# Altium PCB PCB1.PcbDoc
Units mm, origin at the board's own origin, x right, y up, seen from the top; angles counter-clockwise.
Board outline 34.54 x 36.2 mm, 4 copper layers (L1 (Signal), L2 (GND), L3 (3.3V), L4 (Signal)), stack 1.57 mm thick; 24 components, 32 nets, 114 pads, 38 vias.
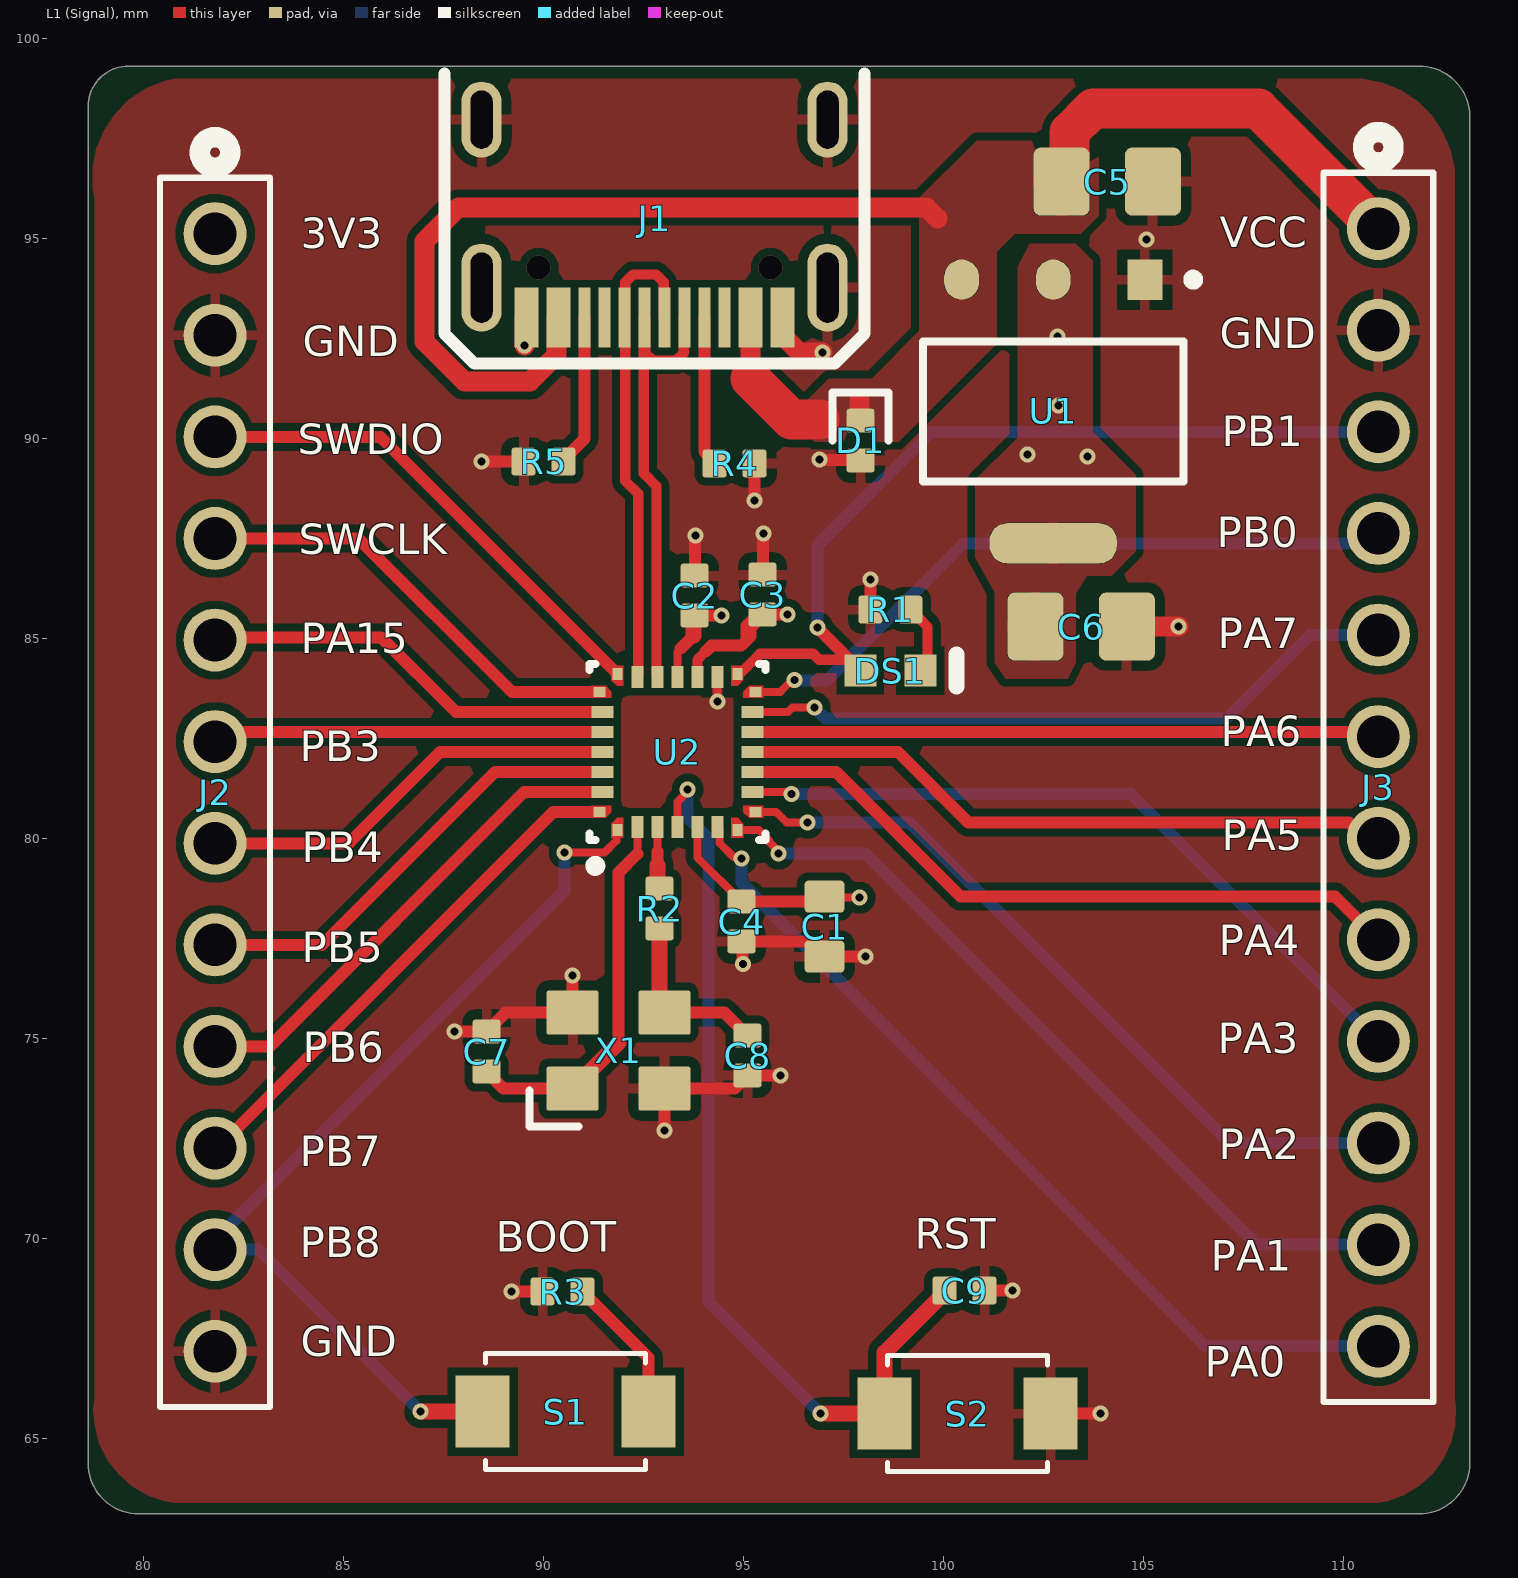
[diagram p0: L1 (Signal) view]
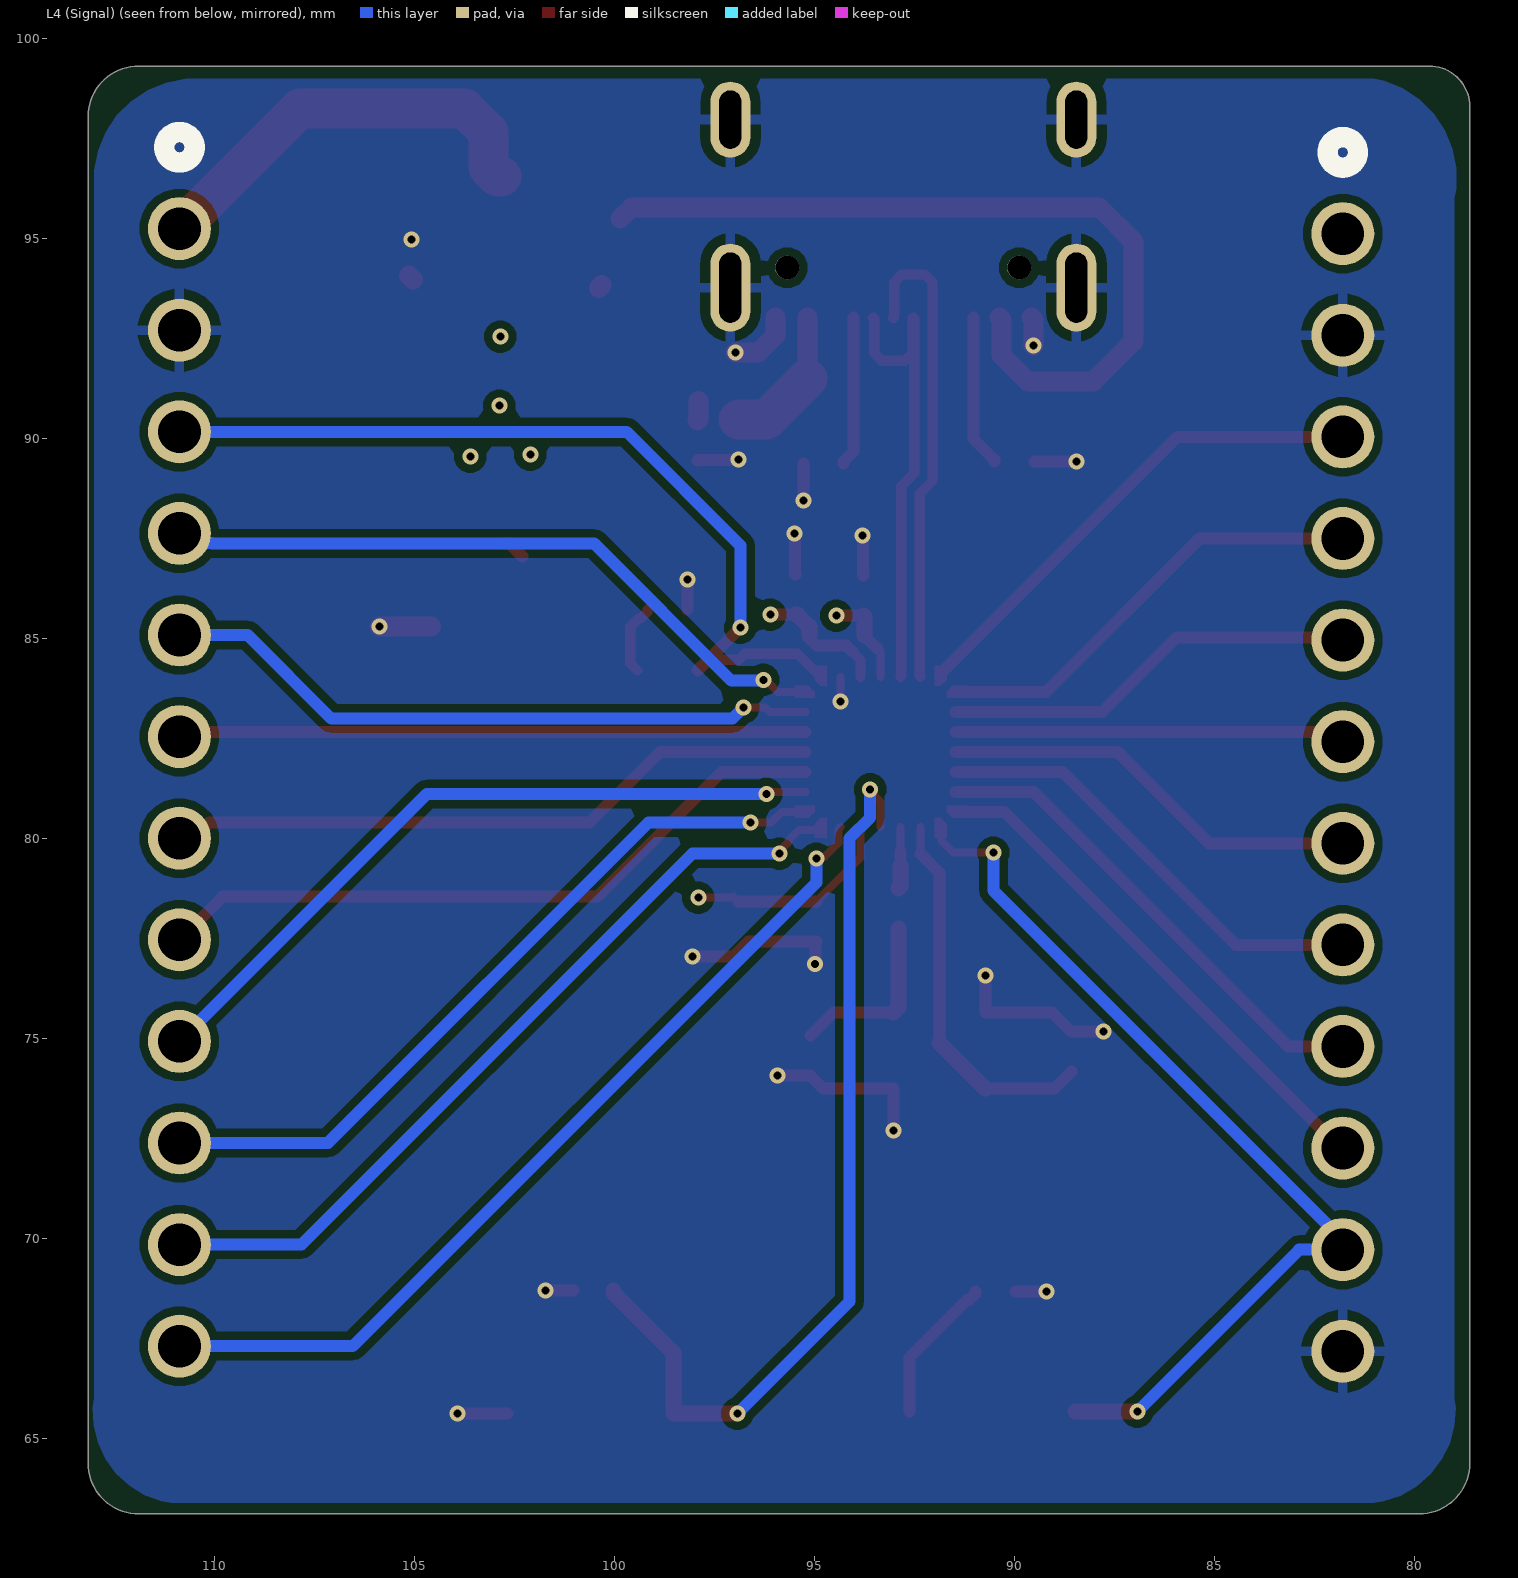
[diagram p1: L4 (Signal) view, seen from below]
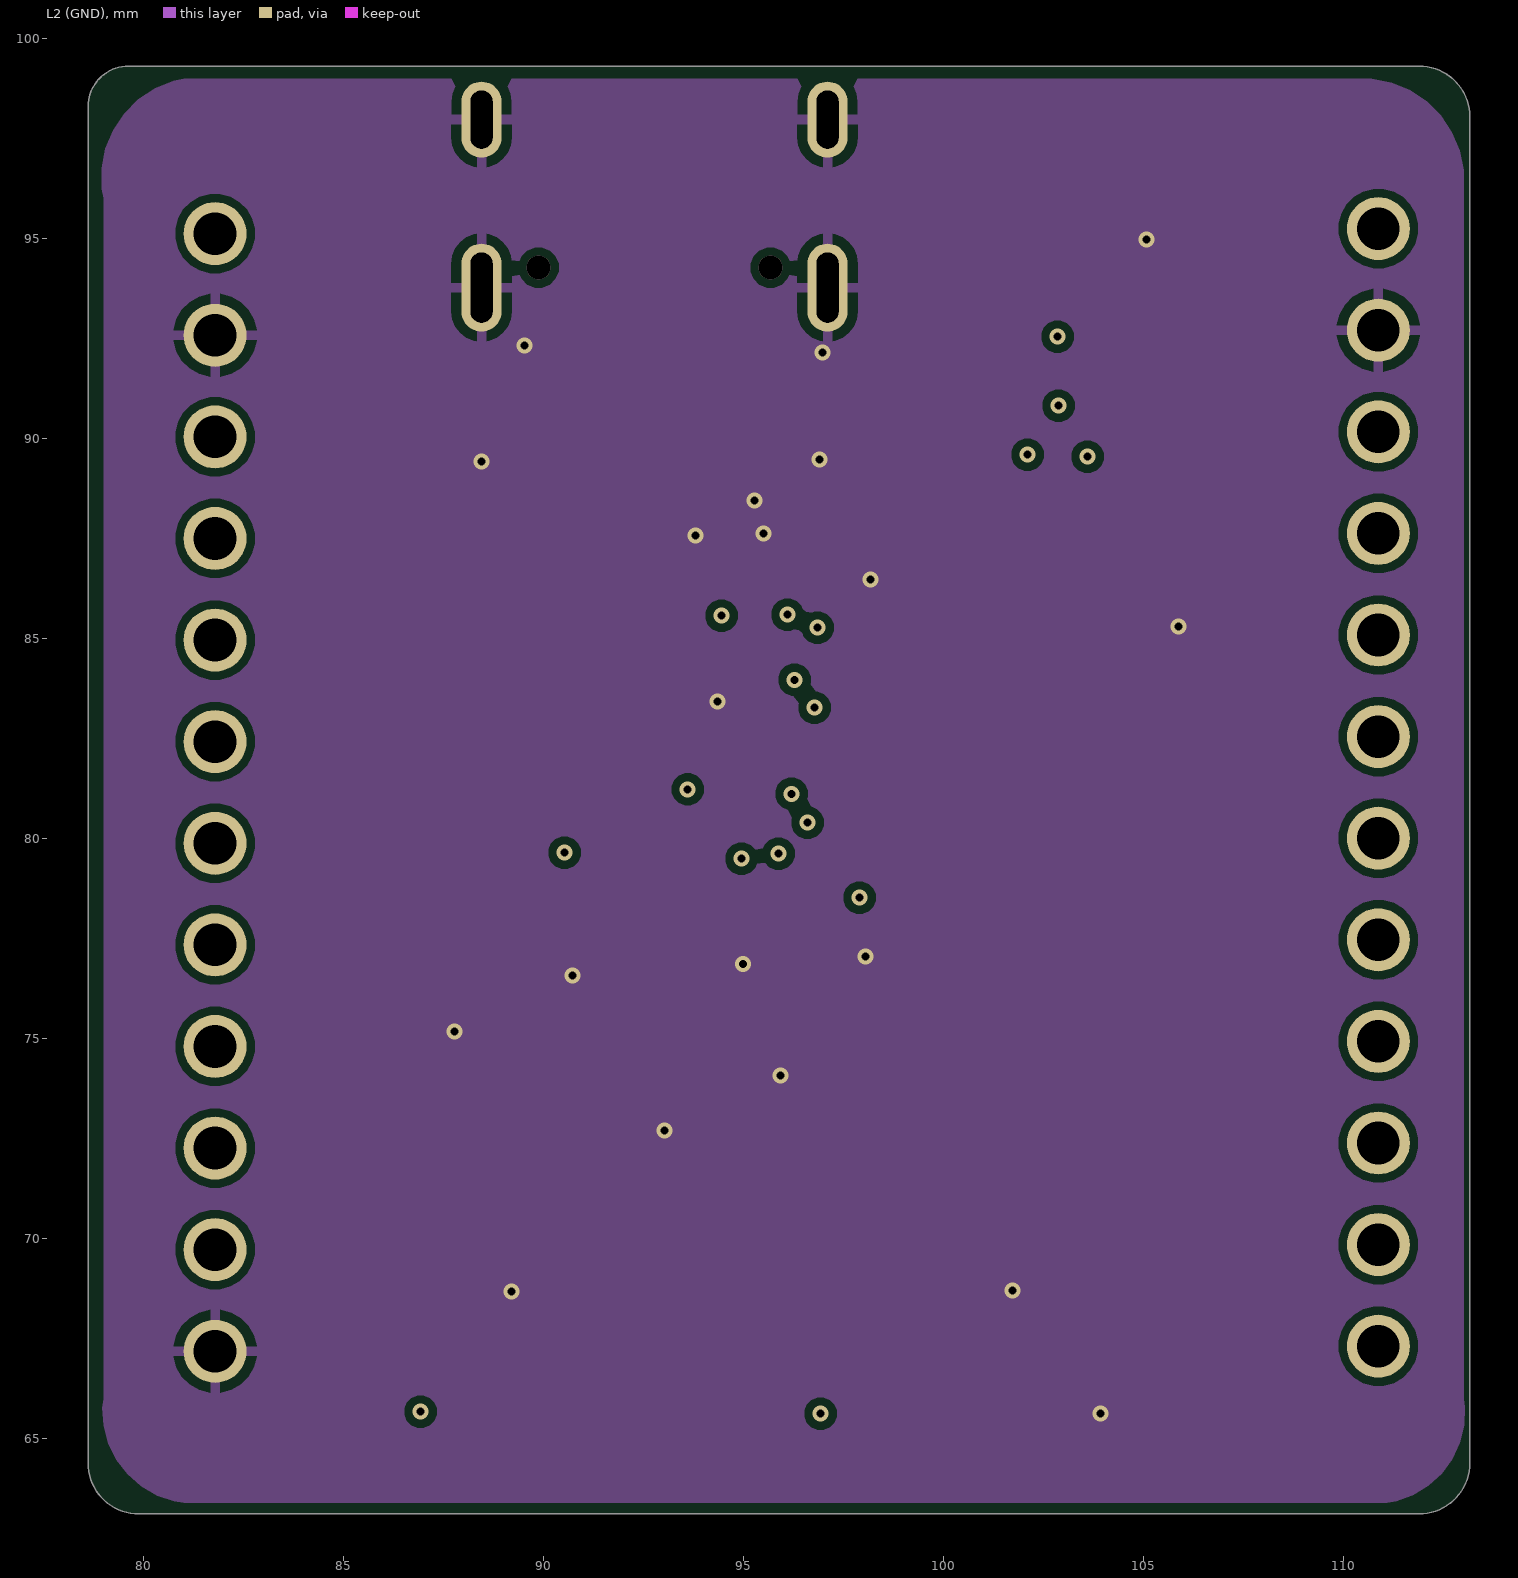
[diagram p2: L2 (GND)]
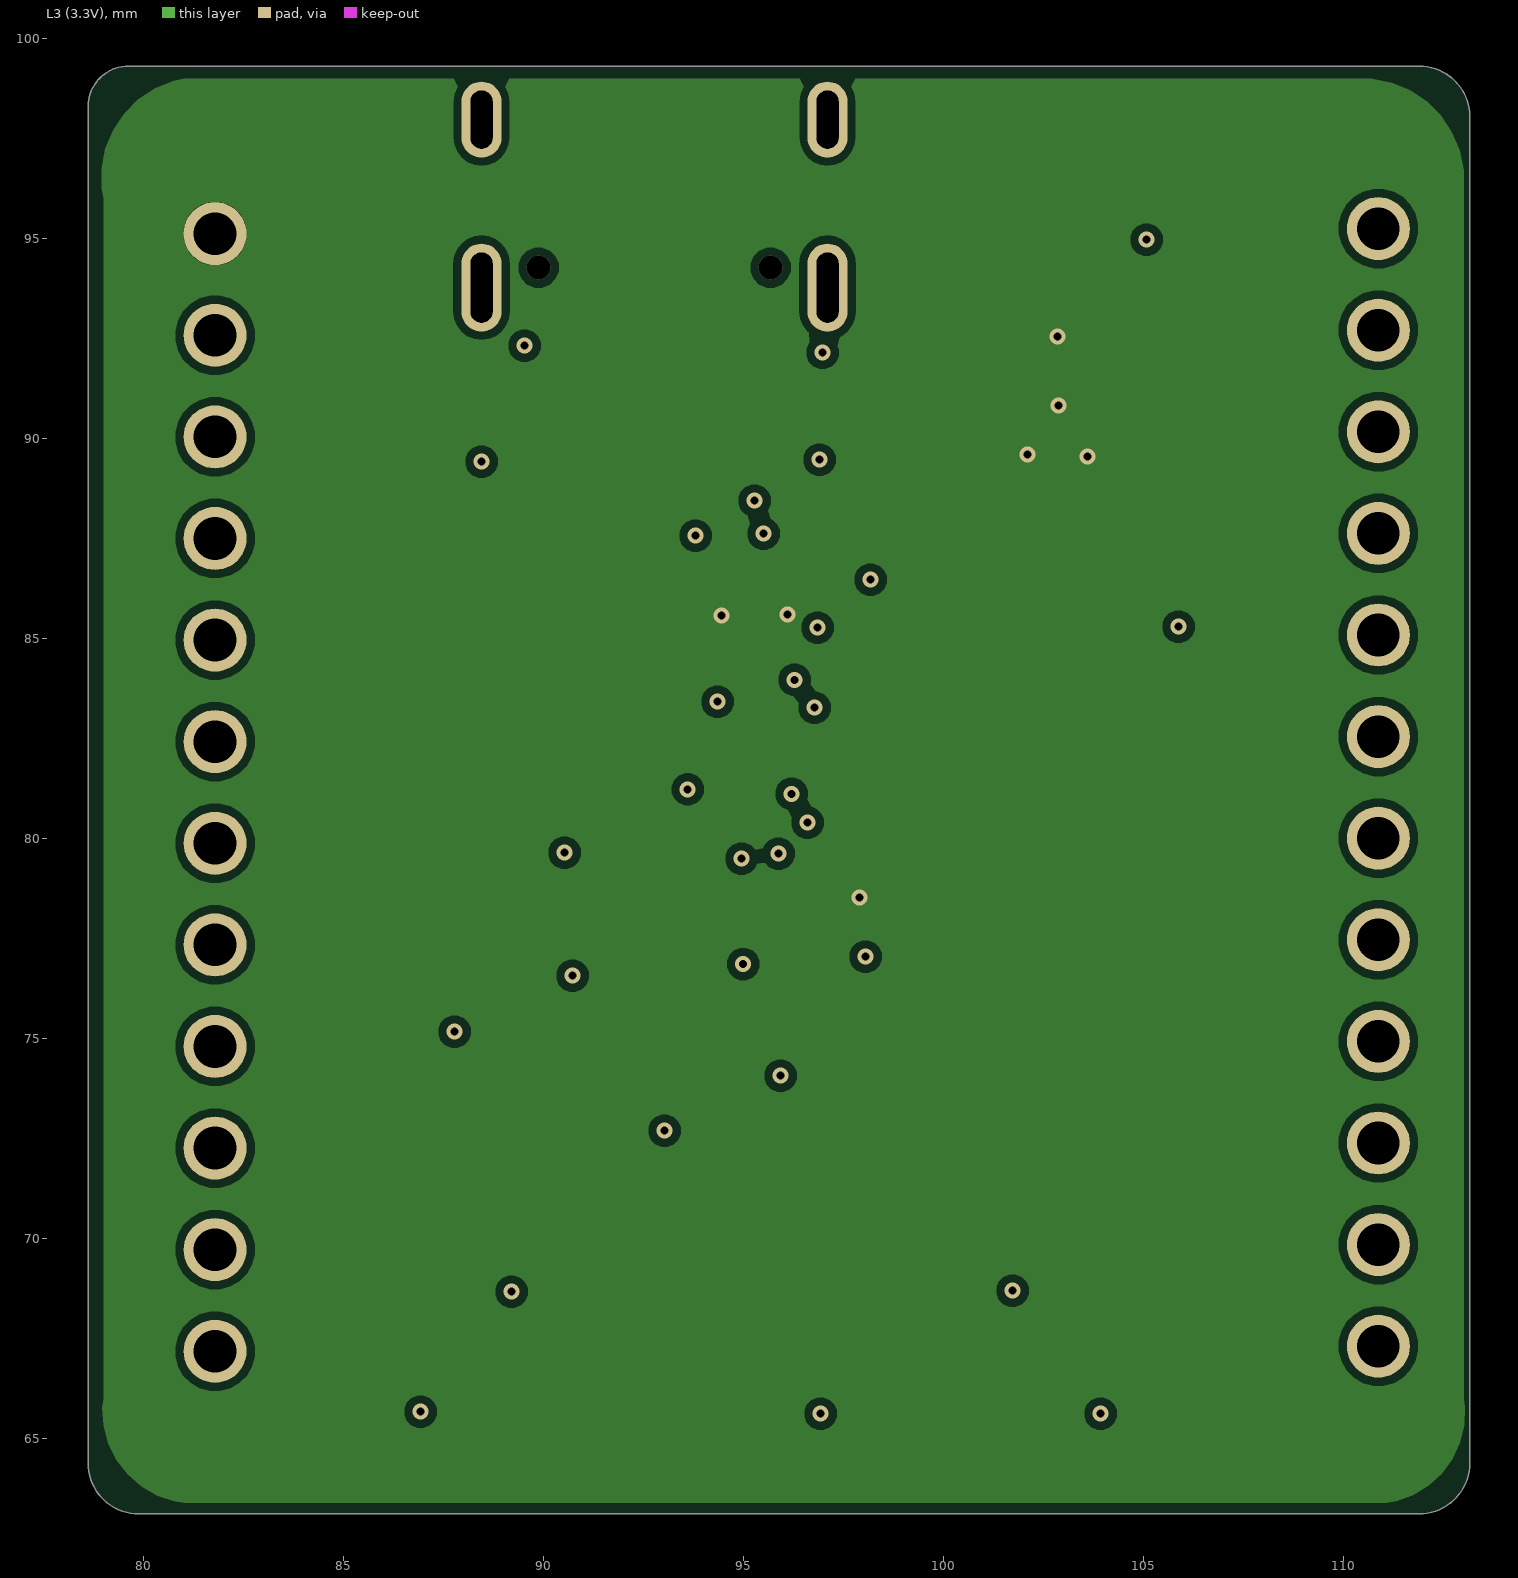
[diagram p3: L3 (3.3V)]
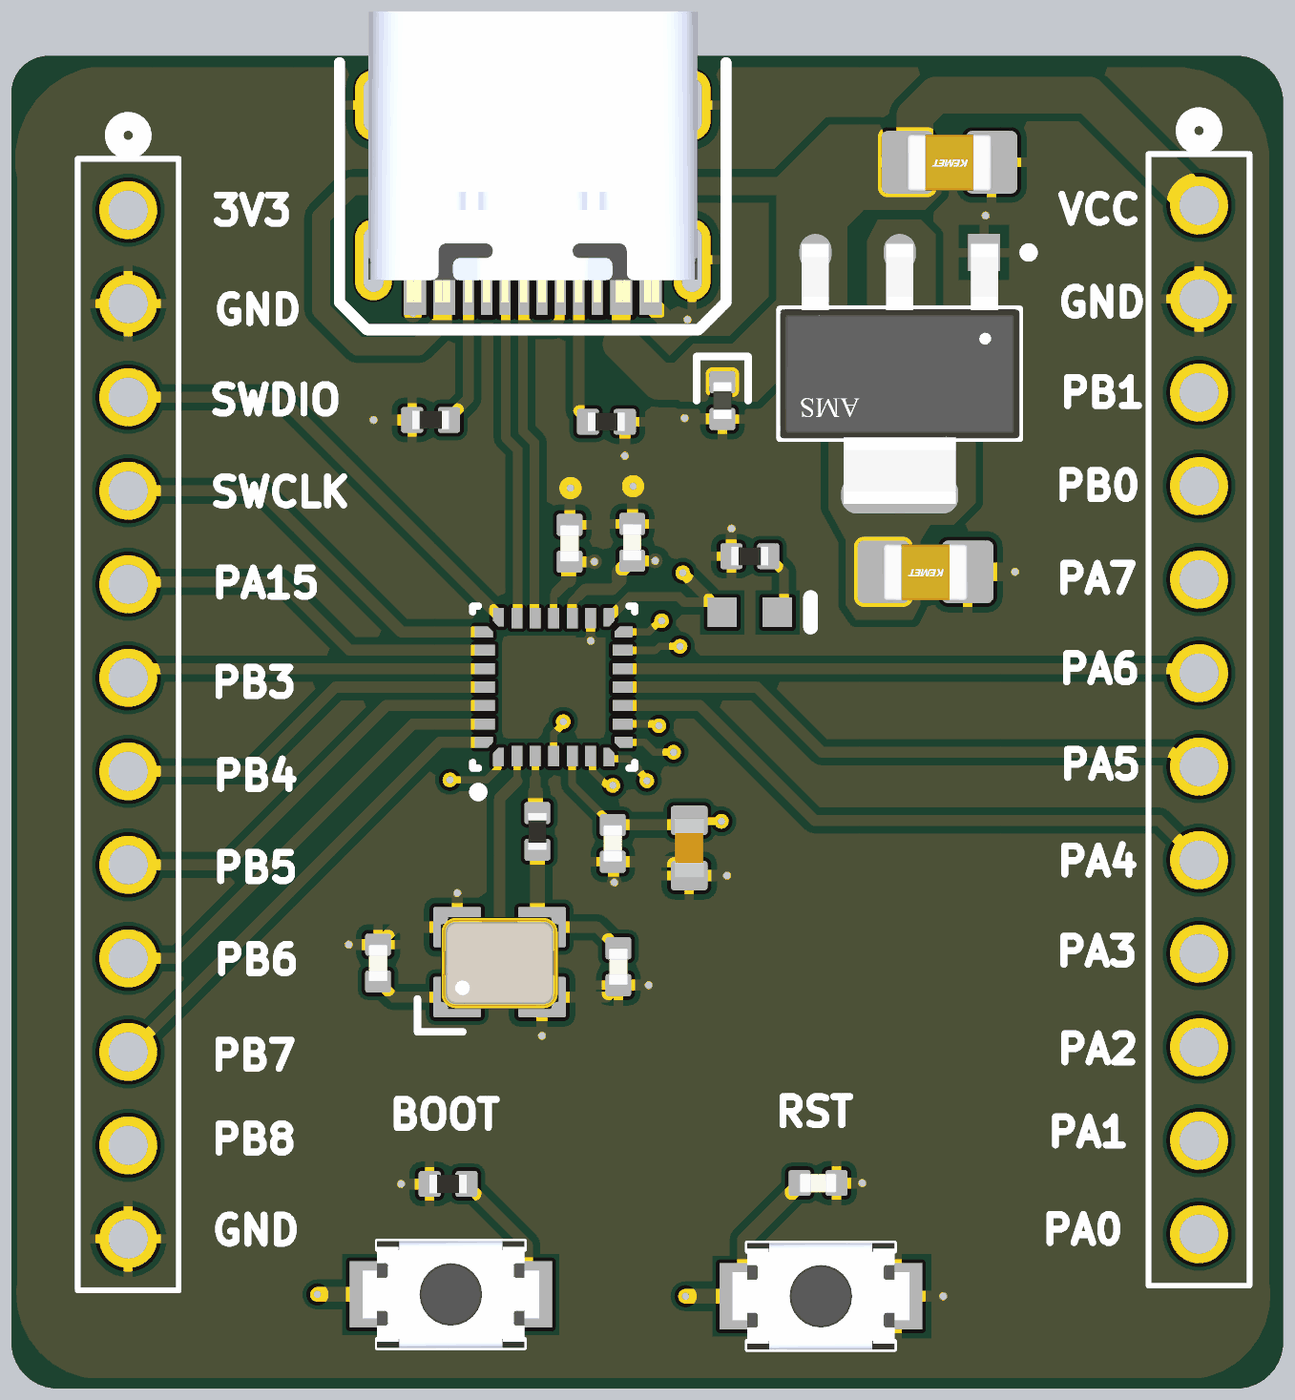
[diagram p4: 3D render of the assembled board from above, using the file's embedded part models]

## Layer stack, top to bottom
Top Solder: solder mask 0.0254, SM-001, Dk 4
L1 (Signal): signal copper 0.035
Dielectric 1: prepreg 0.2, PP-017, Dk 4.6
L2 (GND): signal copper 0.0175
Dielectric 3: core 1.065, Core-039, Dk 4.6
L3 (3.3V): signal copper 0.0175
Dielectric 5: prepreg 0.2, PP-017, Dk 4.6
L4 (Signal): signal copper 0.035
Bottom Solder: solder mask 0.0254, SM-001, Dk 4

## Board outline
78.613,64.389 78.613,98.298 cw(c79.629,98.298) 79.629,99.314 111.887,99.314 cw(c111.887,98.044) 113.157,98.044 113.157,64.389 cw(c111.887,64.389) 111.887,63.119 79.883,63.119 cw(c79.883,64.389)

## Design rules (kind name [scope] priority, off if disabled: settings)
Clearance [All] p1: gap=0.2 ignorepadtopadclearanceinfootprint=FALSE
DiffPairsRouting [All] p1: maxlimit=0.2 minlimit=0.127 mostfreqgap=0.2 toplayer_mingap=0.2 toplayer_minwidth=0.258 toplayer_maxwidth=0.258 toplayer_prefwidth=0.258 midlayer1_maxgap=0.127 midlayer1_prefgap=0.127 midlayer1_minwidth=0.139 midlayer1_maxwidth=0.139 midlayer1_prefwidth=0.139 midlayer2_maxgap=0.127 midlayer2_prefgap=0.127 midlayer2_minwidth=0.139 midlayer2_maxwidth=0.139 midlayer2_prefwidth=0.139 bottomlayer_mingap=0.2 bottomlayer_minwidth=0.258 bottomlayer_maxwidth=0.258 bottomlayer_prefwidth=0.258 impedanceprofiledriven=TRUE impedanceprofileid={1893C149-F7A0-46AF-8BDC-75792B27D51E} impedanceprofilevalue=90.000000 maxuncoupledlength=12.7
MinimumSolderMaskSliver [All] p1: minsoldermaskwidth=0.15
PlaneConnect [InNet('3V3')] p1: planeconnectstyle=Direct reliefexpansion=0.508 reliefentries=4 reliefconductorwidth=0.254 reliefairgap=0.254
PolygonConnect [InNet('GND') vs InNet('GND')] p1: thpad.connectstyle=Relief thpad.reliefconductorwidth=0.25 thpad.reliefentries=4 thpad.polygonreliefangle="90 Angle" thpad.airgapwidth=0.25 smdpad.connectstyle=Relief smdpad.reliefconductorwidth=0.25 smdpad.reliefentries=4 smdpad.polygonreliefangle="90 Angle" smdpad.airgapwidth=0.25 via.connectstyle=Direct via.reliefconductorwidth=0.3 via.reliefentries=4 via.polygonreliefangle="90 Angle" via.airgapwidth=0.3
RoutingVias [All] p1: holewidth=0.2 width=0.4 viastyle="Through Hole" minholewidth=0.2 minwidth=0.4 maxholewidth=0.2 maxwidth=0.6
SilkToSolderMaskClearance [IsPad] p1: minsilkscreentomaskgap=0.2 clearancetoexposedcopper=TRUE
SolderMaskExpansion [All] p1: expansion=0.102 istentingtop=FALSE
SupplyNets "Schematic Supply Nets" [InNet('GND')] p1: voltage=0.000
SupplyNets "Schematic Supply Nets_3" [InNet('VCC')] p2: voltage=0.000
SupplyNets "Schematic Supply Nets_2" [InNet('3V3')] p3: voltage=0.000
UnRoutedNet [All] p1: checkbadconnections=TRUE
Width [All] p1: maxlimit=1 minlimit=0.2 preferedwidth=0.3 midlayer1_prefwidth=0.254 midlayer2_prefwidth=0.254 minimp=50.000000 maximp=50.000000 favimp=50.000000
25 further rules are at their usual default settings.

## Classes and differential pairs
differential pair USB_D: +USB_D_P -USB_D_N

## Components (designator, comment, footprint, x,y, rotation, side; value= is the part's Value field where it differs from the comment)
C1 "10u" CAP_0603 97.025,77.8 r90 top
C2 "100n" CAP_0402 93.775,86.075 r270 top
C3 "100n" CAP_0402 95.475,86.1 r270 top
C4 "100n" CAP_0402 94.95,77.925 r90 top
C5 "22u" CAP_0805 104.093,96.425 r180 top
C6 "22u" CAP_0805 103.443,85.3 r180 top
C7 "10p" CAP_0402 88.575,74.675 r270 top
C8 "10p" CAP_0402 95.1,74.575 r90 top
C9 "100n" CAP_0402 100.525,68.7 r180 top
D1 "D_TVS_0402" D_0402 97.925,89.95 r90 top
DS1 "LED_GREEN" EVRL-0603-2_V 98.671,84.201 r0 top
J1 "TYPE-C-31-M-12" TYPE-C-31-M-12 92.775,95.875 r180 top
J2 "LH_Connector" CONN_SD-42375-001_M320_12_MOL 81.788,95.123 r90 top
J3 "RH_Connector" CONN_SD-42375-001_M320_12_MOL 110.871,95.25 r90 top
R1 "1k" RES_0402 98.671,85.725 r180 top
R2 "0" RES_0402 92.9,78.25 r270 top
R3 "10k" RES_0402 90.475,68.675 r180 top
R4 "5.1k" RES_0402 94.775,89.375 r0 top
R5 "5.1k" RES_0402 90,89.425 r0 top
S1 "" SW_TS-1088-AR02016 90.55,65.675 r0 top
S2 "" SW_TS-1088-AR02016 100.6,65.625 r180 top
U1 "AMS1117-3.3" FP-AMS1117-IPC_C 102.743,90.678 r270 top
U2 "STM32F042G6U6" STM-UFQFPN28_V 93.345,82.169 r90 top
X1 "24MHz" XTAL_3225 91.875,74.7 r0 top

## Footprints (in the part's own frame and the unit in brackets; to place one, negate y for a bottom-side part, rotate by r counter-clockwise, add the part's x,y. Pads: shape width x height; smd on the part's side, far side on the other; paste and mask are expansions set on the pad)
CAP_0402 [mm]
  rrect25% 0.6x0.7 smd: 1(-0.5,0) 2(0.5,0)
  body extent -0.5,-0.26 0.5,0.26, height 0.37
CAP_0603 [mm]
  rrect25% 0.8x1 smd: 1(-0.75,0) 2(0.75,0)
  body extent -0.8,-0.4 0.8,0.4, height 0.51
CAP_0805 [mm]
  rrect25% 1.4x1.7 smd: 1(-1.143,0) 2(1.143,0)
  body extent -1.15,-0.76 1.15,0.79, height 1.01
CONN_SD-42375-001_M320_12_MOL [mil]
  round 62 hole 42: 1(0,0) 2(-100,0) 3(-200,0) 4(-300,0) 5(-400,0) 6(-500,0) 7(-600,0) 8(-700,0) 9(-800,0) 10(-900,0) 11(-1000,0) 12(-1100,0)
  silkscreen extent -1155,-54 95,54
D_0402 [mm]
  rrect25% 0.6x0.7 smd: A(-0.5,0) K(0.5,0)
  silkscreen extent 0,-0.7 1.2,0.7, body extent -0.5,-0.25 0.5,0.25, height 0.51
EVRL-0603-2_V [mm] "SMD, 2-Leads, Body 1.6x0.8mm"
  rect 0.8x0.8 smd: 1(-0.75,0) 2(0.75,0)
  silkscreen extent 1.65,-0.4 1.65,0.4, body extent -0.8,-0.4 0.8,0.4, height 0.5
FP-AMS1117-IPC_C [mm]
  rect 1.004x0.872 smd paste+0 mask+0: 1(-3.295,2.29)
  rrect100% 1.004x0.872 smd paste+0 mask+0: 2(-3.295,0) 3(-3.295,-2.29)
  rrect87% 1.004x3.182 smd paste+0 mask+0: 4(3.295,0)
  silkscreen extent -3.42,-3.25 1.75,3.63, body extent -3.9,-3.35 3.9,3.35, height 0.25
RES_0402 [mm]
  rrect25% 0.6x0.7 smd: 1(-0.5,0) 2(0.5,0)
  body extent -0.5,-0.25 0.5,0.25, height 0.3
STM-UFQFPN28_V [mm] "QFN, 28-Leads, Body 4.1x4.1mm, Pitch 0.5mm"
  rect 0.3x0.25 smd: 1(-1.95,1.5) 7(-1.95,-1.5) 15(1.95,-1.5) 21(1.95,1.5)
  rect 0.55x0.3 smd: 2(-1.875,1) 3(-1.875,0.5) 4(-1.875,0) 5(-1.875,-0.5) 6(-1.875,-1) 16(1.875,-1) 17(1.875,-0.5) 18(1.875,0) 19(1.875,0.5) 20(1.875,1)
  rect 0.25x0.3 smd: 8(-1.5,-1.95) 14(1.5,-1.95) 22(1.5,1.95) 28(-1.5,1.95)
  rect 0.3x0.55 smd: 9(-1,-1.875) 10(-0.5,-1.875) 11(0,-1.875) 12(0.5,-1.875) 13(1,-1.875) 23(1,1.875) 24(0.5,1.875) 25(0,1.875) 26(-0.5,1.875) 27(-1,1.875)
  L1 (Signal) region: 1.35,2.15 1.35,1.65 1.505,1.65 1.65,1.795 1.65,2.15
  L1 (Signal) region: 2.15,1.35 1.65,1.35 1.65,1.505 1.795,1.65 2.15,1.65
  L1 (Signal) region: 1.35,-2.15 1.35,-1.65 1.505,-1.65 1.65,-1.795 1.65,-2.15
  L1 (Signal) region: -1.35,2.15 -1.35,1.65 -1.505,1.65 -1.65,1.795 -1.65,2.15
  L1 (Signal) region: -2.15,1.35 -1.65,1.35 -1.65,1.505 -1.795,1.65 -2.15,1.65
  L1 (Signal) region: -1.35,-2.15 -1.35,-1.65 -1.505,-1.65 -1.65,-1.795 -1.65,-2.15
  L1 (Signal) region: -2.15,-1.35 -1.65,-1.35 -1.65,-1.505 -1.795,-1.65 -2.15,-1.65
  L1 (Signal) region: 2.15,-1.35 1.65,-1.35 1.65,-1.505 1.795,-1.65 2.15,-1.65
  silkscreen extent -2.97,-2.2 2.2,2.2, body extent -2.05,-2.05 2.05,2.05, height 0.6
SW_TS-1088-AR02016 [mm]
  rect 1.35x1.8 smd: 1(-2.075,0) 2(2.075,0)
  silkscreen extent -2,-1.45 2,1.45, body extent -2.4,-1.45 2.4,1.45, height 2
TYPE-C-31-M-12 [mm]
  rect 0.6x1.5 smd mask+0.07: A1B12(-3.2,2.85) B1A12(3.2,2.85)
  rect 0.6x1.5 smd mask+0.14: A4B9(-2.4,2.85) B4A9(2.4,2.85)
  rect 0.3x1.5 smd mask+0.14: A5(-1.25,2.85) A6(-0.25,2.85) A7(0.25,2.85) A8(1.25,2.85) B5(1.75,2.85) B6(0.75,2.85) B7(-0.75,2.85) B8(-1.75,2.85)
  round 0.6 hole 0.6 unplated mask+0.3: MH(-2.9,1.6) MH(2.9,1.6)
  oval 1x1.9 hole 0.55 slot 1.45 at 90 deg mask+0.05: SH(-4.325,-2.1) SH(4.325,-2.1)
  oval 1x2.2 hole 0.55 slot 1.75 at 90 deg mask+0.05: SH(-4.325,2.1) SH(4.325,2.1)
  silkscreen extent -5.25,-3.25 5.25,4, body extent -4.47,-4.65 4.47,3.25, height 3.32
XTAL_3225 [mm]
  rrect10% 1.3x1.1 smd: 1(-1.15,-0.95) 2(1.15,-0.95) 3(1.15,0.95) 4(-1.15,0.95)
  silkscreen extent -2.23,-1.89 -1,-1, body extent -1.6,-1.28 1.6,1.22, height 0.61

## Part data
C1: library part CAP_0603, "Capacitor SMD 0603"
C2 C3 C4 C7 C8 C9: library part CAP_0402, "Capacitor SMD 0402"
C5 C6: library part CAP_0805, "Capacitor SMD 0805"
D1: "Diode TVS / ESD 0402"
DS1: library part CMP-007-00005-2, "Chip LED, Yellow, 5 V, 25mA, -40 to 85 degC, 2-Pin SMD (0603), RoHS, Tape and Reel", Case/Package=0603, Manufacturer="Everlight Electronics", Package Description="2-Pin Surface Mount Device, Body 1.6 x 0.8 mm", Datasheet URL=http://www.fairchip.com/pdf/Everlight/19-217-Y5C-AM1N1VY-3T.pdf, Datasheet Version="Rev. 1.0, 12/2005", Manufacturer URL=http://www.everlight.com/, Mounting Technology=SM, Package Reference=0603, RoHS Compliant=False
J1: "USB Type C Connector Horizontal SMT", Manufacturer="Koren Hroparts", Manufacturer Part Number=TYPE-C-31-M-12
J2 J3: library part CMP-011-000000-1, Package=None, Availability=Unavailable, Component Type=Standard, Design Item ID=22284121, MP=22284121, Pin Count=12, Price=None, Source=22284121.SchLib
R1 R2 R3 R4 R5: library part RES_0402, "Resistor SMD 0402"
S1 S2: library part CMP-005-000000-1, "50mA 4mm 100MÎ© 100,000 Times 12V 160gf 3mm 2mm Round Button Vertical welding SPST SMD Tactile Switches ROHS", Package=Package, Check_prices=https://www.snapeda.com/parts/TS-1088-AR02016/Xunpu/view-part/?ref=eda, Component Type=Standard, ComponentLink1Description="New link", ComponentLink1URL=https://jlcpcb.com/partdetail/XUNPU-TS_1088AR02016/C720477, Design Item ID=TS-1088-AR02016, MF=Xunpu, MP=TS-1088-AR02016, Pin Count=2, SnapEDA_Link=https://www.snapeda.com/parts/TS-1088-AR02016/Xunpu/view-part/?ref=snap, Source=TS-1088-AR02016.SchLib
U1: library part CMP-209535-000001-1, "LDO Voltage Regulators 1A, 3.3V", Dropout Voltage=1.1V, Manufacturer="Advanced Monolithic Systems", Max Junction Temp=+125°C, Max Power Dissipation=1.2W, Max Supply Voltage=15V, Nominal Supply Current=5mA, Output Current=1A, Output Voltage=3.3V, Package=AMS1117, Temperature="-40°C to +125°C", Temperature Range Low=-40°C, Automotive=No, Category=IC, ComponentLink2Description=Datasheet, ComponentLink2URL=http://www.advanced-monolithic.com/pdf/ds1117.pdf, Device Class L1="Integrated Circuits (ICs)", Device Class L2="Power Management ICs", Device Class L3="Voltage Regulators - Linear", Height=1.8mm, Ipc Land Pattern Name=SOT229P700X180-4, Lead Free=Yes, Manufacturer Part Number=AMS1117-3.3, Number Of Outputs=1, Octopart=https://octopart.com/ams1117-3.3-advanced+monolithic+systems-25899300, Output Type=Fixed, RoHS=TRUE, Standoff Height=0.64mm, Temperature Range High=+125°C
U2: library part CMP-0304-00112-2, "ARM Cortex-M0 32-bit MCU, 32 KB Flash, 6 KB Internal RAM, 24 I/Os, 28-Pin UFQFPN, -40 to 85 degC, Tray", I/Os (High Current)=24, Manufacturer=STMicroelectronics, Operating Frequency(F) (Processor speed) (MHz)=48, Package Description="28-Pin Ultra Thin Fine Pitch Quad Flat No-Lead, 4 x 4 x 0.6 mm Body, 0.5 mm Pitch", Package Reference=UFQFPN28, Supply Voltage(Vcc) min (V)=2, ComponentLink1Description="Manufacturer URL", ComponentLink1URL=http://www.st.com/, ComponentLink2Description=Datasheet, ComponentLink2URL=http://www.st.com/st-web-ui/static/active/en/resource/technical/document/datasheet/DM00105814.pdf, Core="ARM Cortex-M0", DatasheetVersion="Rev. 5", FLASH Size (Prog) (kB)=32, Internal RAM Size (kB)=6, Mounting Technology="Surface Mount", Packing=Tray, PartNumber=STM32F042G6U6
X1: library part TSX-3225_24.0000MF15X-AC, "Crystal SMD 24MHz 10PPM 7pF 3225", Manufacturer=Epson, Manufacturer Part Number="TSX-3225 24.0000MF15X-AC", ComponentLink1Description="New link", ComponentLink1URL=https://jlcpcb.com/partdetail/YXC_CrystalOscillators-X322524MSB4SI/C15643

## Via types
v1: diameter 0.4, hole 0.2, L1 (Signal) to L4 (Signal), tented both sides, 24 vias
v2: diameter 0.4, hole 0.2, L1 (Signal) to L4 (Signal), 14 vias

## Nets (pads, with @x,y where several pads share a name; then routed paths per layer and width w, separated by ;. In a path a pad name is that pad's centre, name@x,y a point inside that pad or via, vN(x,y) a via of type N, cw(c..) or ccw(c..) an arc to the next point about the centre after c; other vN are vias at no path point)
3V3: C1.2 C2.2 C3.2 C4.2 C6.2 J2.1 U1.2 U1.4 U2.5 U2.17 U2.18 | length 11.4
  L1 (Signal) w0.2: U2.18 93.345,84.67 93.425,84.75 ; U2.5 93.845,79.53 C4.2 ; C1.2 97.05,78.525 v2(97.9,78.525)
  L1 (Signal) w0.25: U2.17 93.845,84.47 94.05,84.675
  L1 (Signal) w0.3: 93.425,84.75 93.75,85.075 ; C2.2 v1(94.45,85.575) ; 94.05,84.675 94.2,84.825 94.943,84.825 95.126,85.008 95.126,85.079 ; C4.2 C1.2@96.9,78.425 ; C3.2 v1(96.1,85.6) ; U1.4@102.3,87.053 102.63,87.383 U1.4
  L1 (Signal) w0.4: 93.75,85.075 93.75,85.55 C2.2 ; 95.126,85.079 95.126,85.301 95.425,85.6 C3.2
  other v1: 103.6,89.55 102.1,89.6 102.875,90.825 102.85,92.55
BOOT: J2.11 S1.1 U2.1 | length 23.6
  L1 (Signal) w0.2: v2(90.525,79.65) 91.525,79.65 91.82,79.945 91.82,80.194 U2.1
  L1 (Signal) w0.4: v2(86.925,65.675) S1.1
  L4 (Signal) w0.3: v2(86.925,65.675) 82.877,69.723 J2.11 81.788,69.966 90.525,78.703 v2(90.525,79.65)
CC1: J1.A5 R4.1 | length 3.8
  L1 (Signal) w0.3: J1.A5 94.025,89.675 94.275,89.425 R4.1
CC2: J1.B5 R5.2 | length 3.8
  L1 (Signal) w0.3: R5.2 90.5,89.475 91.025,90 J1.B5
GND: C1.1 C2.1 C3.1 C4.1 C5.1 C6.1 C7.1 C8.1 C9.1 D1.A J1.A1B12 J1.B1A12 J1.SH J2.2 J2.12 J3.2 R1.2 R3.2 R4.2 R5.1 S2.1 U1.1 U2.16 X1.2 X1.4 | length 24.9
  L1 (Signal) w0.2: U2.16 94.345,83.43 v1(94.35,83.425)
  L1 (Signal) w0.3: v1(87.775,75.175) C7.1 89.05,75.65 X1.4 v1(90.725,76.575) ; v1(88.45,89.425) R5.1 ; v1(89.2,68.675) R3.2 ; v1(93.025,72.7) X1.2 94.775,73.75 C8.1 v1(95.925,74.075) ; C2.1 93.788,86.588 93.788,87.562 v2(93.8,87.575) ; v1(94.989,76.864) 94.97,76.883 94.97,77.405 C4.1 96.65,77.425 C1.1 v1(98.05,77.05) ; v1(95.275,88.45) R4.2 ; C3.1 95.488,86.612 95.488,87.612 v2(95.5,87.625) ; v1(96.9,89.475) 96.913,89.462 97.913,89.462 D1.A ; R1.2 98.171,86.471 v1(98.175,86.475) ; C9.1 v1(101.725,68.7) ; S2.1 v1(103.925,65.625)
  L1 (Signal) w0.5: v1(89.525,92.325) 89.525,92.975 J1.B1A12 ; J1.A1B12 95.975,92.575 96.4,92.15 v1(96.975,92.15) ; C6.1 v1(105.875,85.3) ; U1.1 U1.1@105.134,94.074
  other v1: 105.075,94.975
HS_OSC_IN: C7.2 U2.2 X1.1 | length 9.5
  L1 (Signal) w0.2: 92.345,79.62 U2.2
  L1 (Signal) w0.3: C7.2 89,73.75 X1.1 ; 91.875,74.9 91.875,79.15 92.345,79.62
  L1 (Signal) w0.4: X1.1 91.875,74.9
HS_OSC_OUT: R2.1 U2.3 | length 1.6
  L1 (Signal) w0.2: 92.845,79.675 U2.3
  L1 (Signal) w0.3: 92.845,79.675 92.845,79.33 92.85,79.325
  L1 (Signal) w0.4: 92.85,79.325 92.85,78.8 R2.1
NetC8_2: C8.2 R2.2 X1.3 | length 4.5
  L1 (Signal) w0.3: X1.3 94.525,75.65 C8.2
  L1 (Signal) w0.4: R2.2 92.9,75.775 X1.3
NetDS1_2: DS1.2 R1.1 | length 1.8
  L1 (Signal) w0.258: R1.1 99.171,85.675 99.342,85.504 99.392,85.504 99.6,85.296 99.6,84.38 DS1.2
NetR3_1: R3.1 S1.2 | length 3.7
  L1 (Signal) w0.3: R3.1 90.975,68.625 91.125,68.475 91.175,68.475 92.625,67.025 S1.2
NRST: C9.2 S2.2 U2.4 | length 23.3
  L1 (Signal) w0.2: U2.4 93.345,80.916 93.604,81.175 v2(93.604,81.229)
  L1 (Signal) w0.4: v2(96.925,65.625) S2.2 98.525,67.15 100.025,68.65 C9.2
  L4 (Signal) w0.3: v2(93.604,81.229) 93.604,80.525 94.125,80.004 94.125,68.425 v2(96.925,65.625)
PA0: J3.12 U2.6 | length 22.5
  L1 (Signal) w0.2: U2.6 94.395,80.244 94.395,79.895 94.751,79.538 94.912,79.538 v2(94.95,79.5)
  L4 (Signal) w0.3: v2(94.95,79.5) 94.95,78.9 106.54,67.31 J3.12
PA1: J3.11 U2.7 | length 20.4
  L1 (Signal) w0.2: U2.7 95.382,80.219 95.643,79.958 95.643,79.911 95.875,79.679 v2(95.875,79.625)
  L4 (Signal) w0.3: v2(95.875,79.625) 98.05,79.625 107.825,69.85 J3.11
PA2: J3.10 U2.8 | length 19
  L1 (Signal) w0.2: U2.8 95.811,80.669 96.08,80.4 v2(96.6,80.4)
  L4 (Signal) w0.3: v2(96.6,80.4) 99.15,80.4 107.16,72.39 J3.10
PA3: J3.9 U2.9 | length 18.2
  L1 (Signal) w0.2: U2.9 96.096,81.169 96.146,81.119 v2(96.2,81.119)
  L4 (Signal) w0.3: v2(96.2,81.119) 104.682,81.119 J3.9
PA4: J3.8 U2.10 | length 17.4
  L1 (Signal) w0.3: U2.10 97.31,81.669 100.429,78.55 109.791,78.55 J3.8
PA5: J3.7 U2.11 | length 16.5
  L1 (Signal) w0.3: U2.11 95.433,82.169 98.856,82.169 100.625,80.4 110.136,80.4 110.526,80.01 J3.7
PA6: J3.6 U2.12 | length 15.7
  L1 (Signal) w0.3: U2.12 110.752,82.669 J3.6
PA7: J3.5 U2.13 | length 16.7
  L1 (Signal) w0.2: U2.13 96.115,83.169 96.221,83.275 v2(96.775,83.275)
  L4 (Signal) w0.3: v2(96.775,83.275) 97.05,83 107.075,83 109.165,85.09 J3.5
PA15: J2.5 U2.23 | length 10.5
  L1 (Signal) w0.3: J2.5 81.85,85.025 85.95,85.025 87.806,83.169 U2.23
PB0: J3.4 U2.14 | length 17.2
  L1 (Signal) w0.2: U2.14 95.919,83.669 96.221,83.971 v2(96.275,83.971)
  L4 (Signal) w0.3: v2(96.275,83.971) 96.294,83.952 96.773,83.952 96.775,83.95 97.075,83.95 100.508,87.383 110.058,87.383 110.061,87.386 110.627,87.386 J3.4
PB1: DS1.1 J3.3 U2.15 | length 21.9
  L1 (Signal) w0.258: U2.15 94.849,84.123 94.849,84.14 94.935,84.14 95.42,84.625 96.741,84.625 96.894,84.472 DS1.1@97.65,84.472
  L1 (Signal) w0.3: v2(96.85,85.275) 96.85,85.272 97.65,84.472 DS1.1
  L4 (Signal) w0.3: v2(96.85,85.275) 96.85,87.328 99.692,90.17 J3.3
PB3: J2.6 U2.24 | length 9.8
  L1 (Signal) w0.3: J2.6 82.032,82.667 82.599,82.667 82.601,82.669 U2.24
PB4: J2.7 U2.25 | length 10.6
  L1 (Signal) w0.3: J2.7 85.133,79.883 87.419,82.169 U2.25
PB5: J2.8 U2.26 | length 11.5
  L1 (Signal) w0.3: J2.8 84.468,77.343 88.794,81.669 U2.26
PB6: J2.9 U2.27 | length 12.3
  L1 (Signal) w0.3: J2.9 83.153,74.803 89.519,81.169 U2.27
PB7: J2.10 U2.28 | length 13.1
  L1 (Signal) w0.3: J2.10 81.845,72.263 90.251,80.669 U2.28
SWCLK: J2.4 U2.22 | length 11.2
  L1 (Signal) w0.3: J2.4 85.372,87.503 89.206,83.669 U2.22
SWDIO: J2.3 U2.21 | length 12.5
  L1 (Signal) w0.3: J2.3 85.921,90.043 U2.21
USB_D_N: J1.A7 J1.B7 U2.19 | length 12
  L1 (Signal) w0.258: U2.19 92.824,84.065 92.824,84.455 92.824,88.809 92.504,89.129 92.504,92.362 92.504,93.004 J1.A7 92.546,93.004 92.546,92.139 92.739,91.946 93.311,91.946 93.504,92.139 93.504,93.004 J1.B7
USB_D_P: J1.A6 J1.B6 U2.20 | length 12
  L1 (Signal) w0.258: U2.20 92.366,84.065 92.366,88.619 92.046,88.939 92.046,93.911 92.239,94.104 92.811,94.104 93.004,93.911 93.004,93.046 J1.A6
VCC: C5.2 D1.K J1.A4B9 J1.B4A9 J3.1 U1.3 | length 35.7
  L1 (Signal) w0.5: J1.B4A9 90.325,92.975 90.325,92.089 89.661,91.425 88.025,91.425 87.025,92.425 87.025,94.932 87.871,95.778 99.572,95.778 99.85,95.5 ; 95.175,91.5 J1.A4B9 ; 97.9,90.934 97.9,90.475 D1.K ; U1.3@100.316,93.836 U1.3@100.382,93.77 ; C5.2@102.825,96.55 C5.2
  L1 (Signal) w1: 95.175,91.5 96.2,90.475 96.9,90.475 ; C5.2@102.825,96.55 102.925,96.55 103.15,96.775 103.15,97.664 103.736,98.25 107.871,98.25 J3.1
pads on no net: J1.A8 J1.B8 J1.MH

## Polygon pours and split planes (outlines as drawn)
GND on L1 (Signal) "GND_L01_P022" (solid, pour order 22): 78.775,66 78.775,96.006 cw(c81.272,96.503) 80.775,99 110.235,99 cw(c110.235,96.46) 112.775,96.46 112.775,66 cw(c110.52,65.655) 110.865,63.4 80.775,63.4 cw(c81.072,65.698)
3V3 on L1 (Signal) "3V3_L01_P011" (solid, pour order 11): 101.85,84 101.55,84 101.275,84.4 101.275,86.162 100.797,87.027 100.797,88.972 101.85,90.025 101.85,94.3 102.15,94.875 103.3,94.875 103.725,94.45 103.725,90.175 104.804,89.096 104.804,87.179 104.2,86.575 103.575,86.575 103.3,86.125 103.3,84.4 103.1,84 102,84
VCC on L1 (Signal) "VCC_L01_P016" (solid, pour order 16): 98.2,91.5 99.39,92.691 99.39,96.016 100.825,97.45 103.6,97.45 103.875,97.175 103.875,95.575 103.425,95.125 101.75,95.125 101.75,95.1 101.325,94.675 101.325,92.375 98.875,89.925 96.775,89.925 96.6,90.1 96.6,90.975 97.125,91.5
3V3 on L3 (3.3V) "3V3_L03_P004" (solid, pour order 4): 79,66 79,96.006 cw(c81.497,96.503) 81,99 110.46,99 cw(c110.46,96.46) 113,96.46 113,66 cw(c110.745,65.655) 111.09,63.4 81,63.4 cw(c81.297,65.698)
GND on L2 (GND) "GND_L02_P000" (solid, pour order 0): 79,66 79,96.006 cw(c81.497,96.503) 81,99 110.46,99 cw(c110.46,96.46) 113,96.46 113,66 cw(c110.745,65.655) 111.09,63.4 81,63.4 cw(c81.297,65.698)
GND on L4 (Signal) "GND_L04_P020" (solid, pour order 20): 79,66 79,96.006 cw(c81.497,96.503) 81,99 110.46,99 cw(c110.46,96.46) 113,96.46 113,66 cw(c110.745,65.655) 111.09,63.4 81,63.4 cw(c81.297,65.698)

## Silkscreen, mask and mechanical layers (free items; w line width, h text height)
Top Overlay:
  text "VCC" at 106.904,94.779 h0.76
  text "3V3" at 83.929,94.754 h0.76
  text "GND" at 106.904,92.254 h0.76
  text "GND" at 83.979,92.054 h0.76
  text "PB1" at 106.954,89.804 h0.76
  text "SWDIO" at 83.854,89.604 h0.76
  text "PB0" at 106.829,87.279 h0.76
  text "SWCLK" at 83.879,87.104 h0.76
  text "PA7" at 106.854,84.754 h0.76
  text "PA15" at 83.929,84.629 h0.76
  text "PA6" at 106.929,82.304 h0.76
  text "PB3" at 83.904,81.929 h0.76
  text "PA5" at 106.954,79.704 h0.76
  text "PB4" at 83.954,79.404 h0.76
  text "PA4" at 106.879,77.079 h0.76
  text "PB5" at 83.954,76.904 h0.76
  text "PA3" at 106.854,74.629 h0.76
  text "PB6" at 83.979,74.404 h0.76
  text "PA2" at 106.879,71.979 h0.76
  text "PB7" at 83.904,71.804 h0.76
  text "RST" at 99.275,69.75 h0.76
  text "BOOT" at 88.8,69.675 h0.76
  text "PB8" at 83.904,69.529 h0.76
  text "PA1" at 106.675,69.2 h0.76
  text "GND" at 83.929,67.054 h0.76
  text "PA0" at 106.525,66.55 h0.76
Mechanical 1:
  the board outline again, w0.2